# Altium PCB A.PcbDoc (part 2 of 3)
Units mm, origin at the board's own origin, x right, y up, seen from the top; angles counter-clockwise.
Board outline 93 x 60 mm, 2 copper layers (Top Layer, Bottom Layer); 76 components, 75 nets, 446 pads, 247 vias.
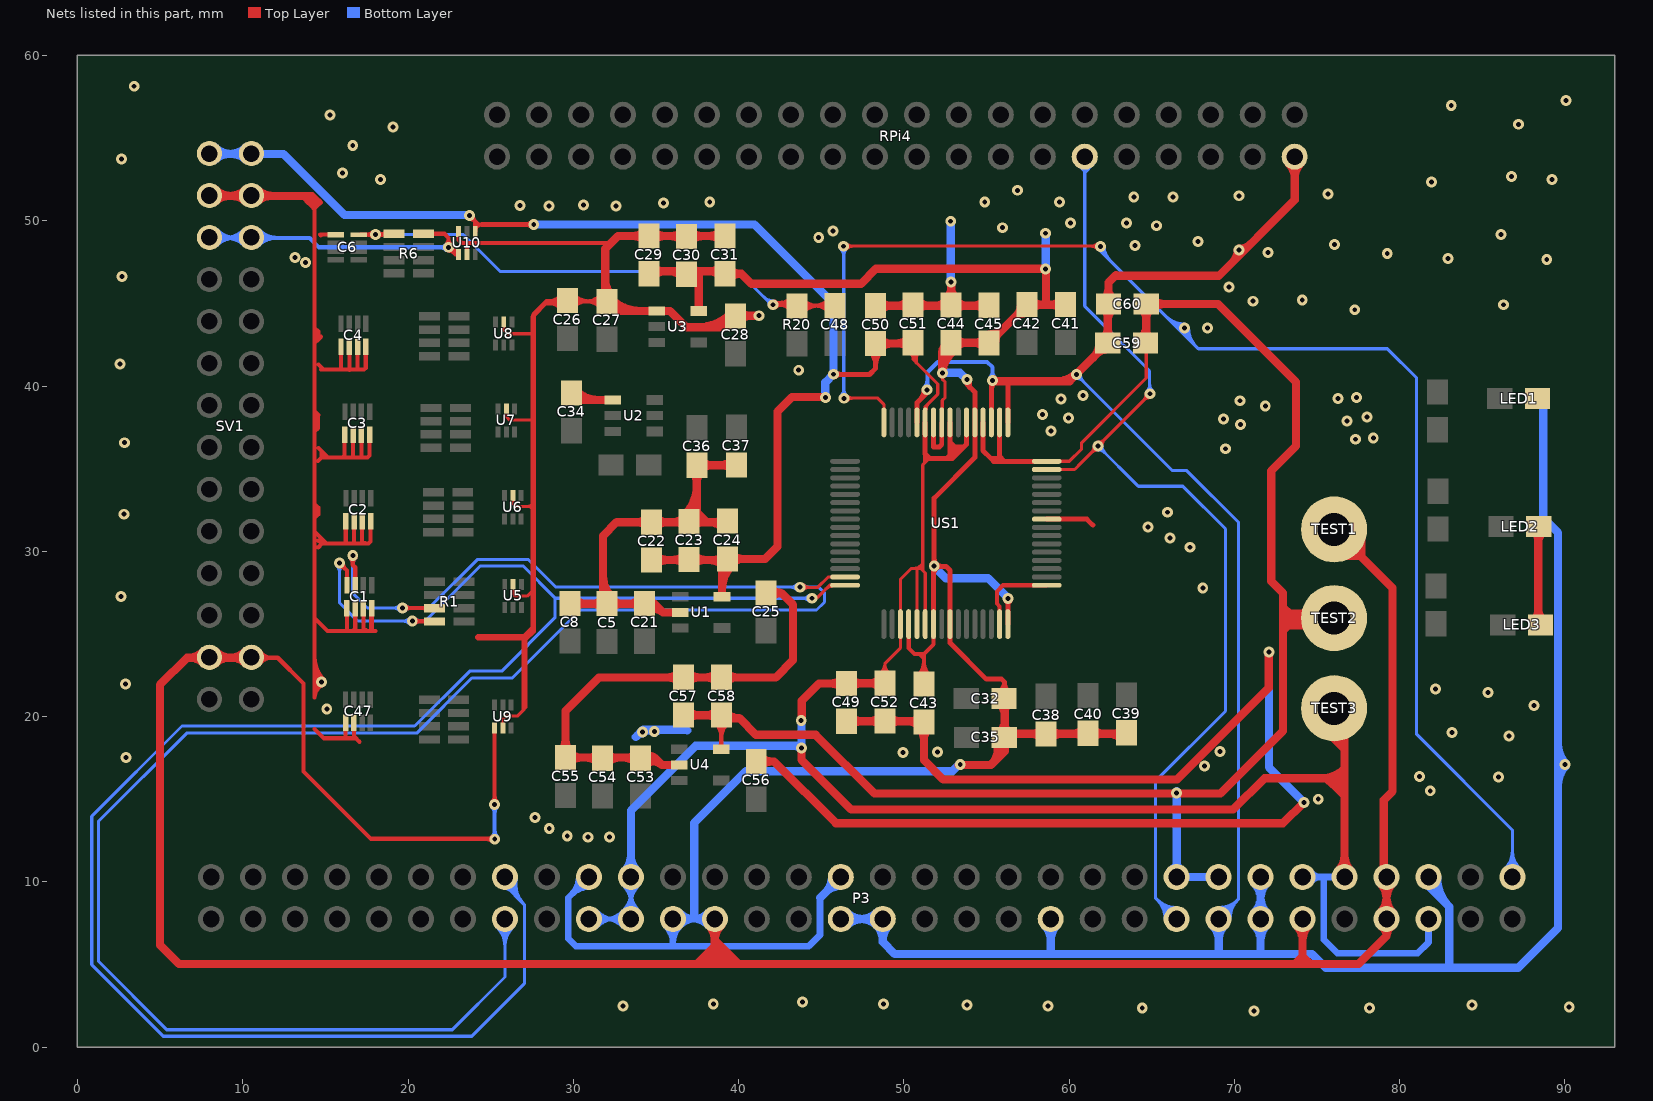
[diagram p2: the nets of this part, all layers, seen from the top]

## Via types
v1: diameter 0.66, hole 0.3, Top Layer to Bottom Layer, tented both sides, 247 vias

## Nets (pads, with @x,y where several pads share a name; then routed paths per layer and width w, separated by ;. In a path a pad name is that pad's centre, name@x,y a point inside that pad or via, vN(x,y) a via of type N, cw(c..) or ccw(c..) an arc to the next point about the centre after c; other vN are vias at no path point) (continued)
AVDD: C22.1 C23.1 C24.1 C49.1 C50.1 C51.1 C52.1 P3.19 P3.21 P3.22 P3.54 P3.56 P3.59 SV1.25 SV1.26 TEST3.1 U1.5 U10.4 US1.19 US1.21 US1.22 US1.54 US1.56 US1.59 | length 267.2
  Top Layer w0.19: C49.1@46.526,22.004 C49.1@46.538,22.016 ; C52.1@48.534,22.581 ccw(c48.087,23.199) 48.85,23.199 ; C52.1@48.645,22.427 ccw(c48.355,22.828) 48.85,22.828 ccw(c49.344,22.828) C52.1@49.055,22.427 ; C52.1@48.85,22.016 48.85,23.199 ; C52.1@49.166,22.581 cw(c49.613,23.199) 48.85,23.199 ; C51.1@50.32,42.007 cw(c50.116,41.607) 50.565,41.607 ; C51.1@50.36,41.989 cw(c50.12,41.403) 50.753,41.403 ; C51.1@50.432,42.165 cw(c50.236,41.686) 50.753,41.686 ; C51.1@50.516,42.566 C51.1@50.565,42.616 50.565,41.607 ; 50.753,41.639 cw(c51.415,41.639) C51.1@50.947,42.107 ; US1.21@50.793,25.596 50.793,28.919 ; US1.22@51.293,25.596 51.293,28.684 51.143,28.834 ; 51.293,35.886 51.241,35.834 51.241,35.329 ; US1.59@51.293,37.796 51.293,38.752 52.053,39.512 52.053,40.12 50.753,41.419 ; US1.59@51.348,38.546 cw(c51.979,38.546) 51.533,38.992 ; 51.386,35.793 51.399,35.78 51.399,35.487 ; 51.524,35.612 51.399,35.487 ; 48.85,23.199 49.793,24.142 US1.19@49.793,25.596 49.793,28.295 50.466,28.968 50.625,28.968 ; 50.565,41.607 cw(c51.014,41.607) 50.81,42.007 ccw(c50.948,41.87) 50.753,41.87 50.753,41.419 ; 50.565,41.607 50.753,41.419 ; 50.625,28.968 ccw(c50.625,29.535) 51.026,29.134 51.143,29.252 ; 50.625,28.968 51.009,28.968 51.143,28.834 ; 51.143,28.834 51.143,29.252 ; 51.143,29.252 51.143,35.231 51.241,35.329 ; 51.241,35.329 51.399,35.487
  Top Layer w0.25: v1(23.726,50.305) 24.067,49.963 ; v1@23.729,50.1 cw(c23.737,49.633) 24.067,49.963 ; v1@23.931,50.301 ccw(c24.398,50.293) 24.067,49.963 ; U10.4@24.067,49.356 24.067,49.963 ; U10.4@24.09,49.53 cw(c24.471,49.352) 24.471,49.773 24.257,49.773 24.067,49.963 ; C24.1@38.998,29.217 39.254,29.472 C24.1@39.32,29.538
  Top Layer w0.3: 24.471,49.773 v1(27.608,49.773) ; v1@27.48,49.646 ccw(c27.173,49.338) 27.173,49.773 ccw(c27.173,50.207) v1@27.48,49.9 ; v1@45.727,40.599 45.822,40.694 47.922,40.694 48.295,41.067 C50.1@48.295,42.566 ; v1@45.866,40.585 cw(c46.129,40.322) 46.129,40.694 ; v1@45.866,40.84 ccw(c46.218,41.192) 46.218,40.694 ; C50.1@47.952,42.096 cw(c47.124,41.268) 48.295,41.268 cw(c49.466,41.268) C50.1@48.638,42.096 ; US1.59@51.293,37.796 51.293,35.886 51.386,35.793 ; 51.399,35.78 51.565,35.614 52.6,35.614 ; US1.56@52.793,37.796 52.793,36.587 ; US1.54@53.793,37.796 53.793,36.47 53.635,36.312 ; 52.6,35.614 52.793,35.807 52.793,36.233 ; 52.6,35.614 52.938,35.614 53.056,35.733 ; 52.793,36.233 52.979,36.046 ; 52.793,36.233 52.793,36.587 ; 52.793,36.587 53.069,36.312 53.635,36.312 ; 52.979,36.046 53.369,36.046 ; 52.979,36.046 53.056,35.97 53.056,35.733 ; 53.056,35.733 53.369,36.046 ; 53.369,36.046 53.635,36.312
  Top Layer w0.5: C22.1@34.741,29.472 C24.1@39.254,29.472 ; C22.1@35.014,29.2 cw(c35.671,28.543) 35.671,29.472 cw(c35.671,30.402) C22.1@35.014,29.744 ; 35.986,29.472 ccw(c35.986,30.537) C23.1@36.739,29.784 ; 36.177,29.472 cw(c36.177,28.678) C23.1@36.739,29.24 ; C23.1@37.283,29.24 cw(c37.845,28.678) 37.845,29.472 ; C23.1@37.283,29.784 ccw(c38.036,30.537) 38.036,29.472 ; 38.243,29.472 cw(c38.243,28.334) C24.1@39.048,29.139 ; 38.538,29.472 ccw(c38.538,30.193) C24.1@39.048,29.683 ; U1.5@38.998,27.252 C24.1@38.998,29.217 ; 38.998,27.705 cw(c41.026,27.705) C24.1@39.592,29.139 ; C24.1@39.32,29.538 41.61,29.538 42.351,30.279 42.351,38.46 43.228,39.337 45.18,39.337 v1@45.252,39.265 ; C24.1@39.592,29.266 cw(c40.249,28.609) 40.249,29.538 cw(c40.249,30.468) C24.1@39.592,29.81 ; v1@43.814,18.148 v1(43.814,18.11) 43.814,17.382 46.816,14.381 69.928,14.381 71.814,16.267 75.252,16.267 ; v1@43.829,19.718 43.829,20.96 44.873,22.004 C49.1@46.526,22.004 ; C49.1@46.253,21.732 ccw(c45.596,21.074) 45.596,22.004 ccw(c45.596,22.933) C49.1@46.253,22.276 ; C49.1@46.538,22.016 C52.1@48.85,22.016 ; C49.1@46.798,21.732 cw(c47.484,21.045) 47.484,22.016 ; C49.1@46.798,22.276 ccw(c47.426,22.904) 47.426,22.016 ; C50.1@48.295,42.566 C51.1@50.516,42.566 ; C50.1@48.567,42.294 cw(c49.224,41.637) 49.224,42.566 cw(c49.224,43.496) C50.1@48.567,42.838 ; C52.1@48.578,21.744 ccw(c47.92,21.087) 47.92,22.016 ccw(c47.92,22.945) C52.1@48.578,22.288 ; 49.517,42.566 ccw(c49.517,43.664) C51.1@50.293,42.888 ; 49.755,42.566 cw(c49.755,41.805) C51.1@50.293,42.343 ; TEST3.1@74.665,20.026 76.665,18.025 ; TEST3.1@76.036,20.501 76.665,19.872 76.665,18.025 ; P3.56@76.285,10.672 ccw(c75.367,11.59) 76.665,11.59 ccw(c77.962,11.59) P3.56@77.045,10.672 ; 76.631,15.854 76.034,15.854 ; P3.56@76.665,10.292 76.665,15.223 ; 75.252,16.267 ccw(c75.252,18.265) 76.665,16.852 ; 75.252,16.267 75.579,16.267 75.991,15.854 ; 75.991,15.854 76.665,16.528 ; 75.991,15.854 76.034,15.854 ; 76.034,15.854 76.665,15.223 ; 76.665,15.223 76.665,16.528 ; 76.665,16.528 76.665,16.852 ; 76.665,16.852 76.665,18.025
  Bottom Layer w0.19: P3.19@30.945,7.752 P3.21@33.485,7.752 P3.22@33.485,10.292 ; P3.19@31.3,7.397 cw(c32.158,6.54) 32.158,7.752 cw(c32.158,8.965) P3.19@31.3,8.108 ; P3.19@31.434,7.263 cw(c32.616,6.081) 32.616,7.752 cw(c32.616,9.424) P3.19@31.434,8.242 ; P3.21@32.995,7.263 ccw(c31.813,6.081) 31.813,7.752 ccw(c31.813,9.424) 32.995,8.242 ccw(c31.813,9.424) 33.485,9.424 ccw(c35.156,9.424) P3.21@33.974,8.242 ; P3.22@32.995,9.803 cw(c31.813,8.621) 33.485,8.621 cw(c35.156,8.621) P3.22@33.974,9.803 ; P3.21@33.13,7.397 ccw(c32.272,6.54) 32.272,7.752 ccw(c32.272,8.965) 33.13,8.108 ccw(c32.272,8.965) 33.485,8.965 ccw(c34.698,8.965) P3.21@33.84,8.108 ; P3.22@33.13,9.937 cw(c32.272,9.08) 33.485,9.08 cw(c34.698,9.08) P3.22@33.84,9.937 ; v1@43.72,19.638 43.814,19.638 v1@43.829,19.638 ; 75.18,10.292 75.4,10.072
  Bottom Layer w0.4: P3.54@74.125,10.292 75.18,10.292 ; P3.54@74.624,9.983 cw(c75.18,9.639) 75.18,10.292 ; P3.54@74.624,10.602 ccw(c75.18,10.946) 75.18,10.292 ; 75.4,10.072 75.4,6.51 76.236,5.675 81.082,5.675 81.745,6.338 P3.59@81.745,7.752 ; P3.56@76.665,10.292 75.18,10.292
  Bottom Layer w0.5: SV1.26@7.903,54.038 12.471,54.038 16.158,50.351 v1@23.465,50.351 ; SV1.26@8.346,53.705 cw(c9.151,52.9) 9.151,54.038 ; SV1.26@8.346,54.429 ccw(c9.29,55.372) 9.29,54.038 ; 9.218,54.038 ccw(c9.218,55.372) SV1.25@10.162,54.429 ; 9.358,54.038 cw(c9.358,52.9) SV1.25@10.162,53.705 ; v1(27.608,49.773) 40.967,49.773 45.739,45.001 v1(45.739,40.712) 45.252,40.225 v1@45.252,39.265 ; P3.22@33.105,10.672 ccw(c32.187,11.59) 33.485,11.59 ccw(c34.782,11.59) P3.22@33.865,10.672 ; P3.22@33.485,10.292 33.485,14.318 37.4,18.234 v1@43.814,18.234 ; 43.322,18.234 cw(c43.322,17.618) v1@43.758,18.054 ; v1(43.791,19.751) v1@43.814,19.727 ; v1@43.814,18.148 v1@43.814,19.638
  other v1: 45.261,39.313
AVSS: C29.1 C30.1 C31.1 C32.2 C35.1 C38.2 C39.2 C40.2 C41.2 C42.2 C43.1 C44.1 C45.1 P3.20 P3.23 P3.25 P3.32 P3.53 P3.57 P3.58 SV1.1 SV1.2 TEST1.1 U3.5 U9.1 US1.20 US1.23 US1.25 US1.32 US1.53 US1.57 US1.58 | length 418.7
  Top Layer w0.19: C29.1@34.733,46.792 C29.1@34.886,46.945 ; C31.1@39.179,46.792 39.179,46.927 39.197,46.945 C31.1@39.22,46.945 ; v1@51.792,29.008 51.861,29.077 51.861,29.085 v1(51.837,29.109) ; v1@52.223,40.592 cw(c52.124,40.406) 52.334,40.406 ; US1.57@52.254,38.585 ccw(c52.091,38.748) 52.322,38.748 ; US1.57@52.293,37.796 52.322,37.825 52.322,39.132 52.496,39.306 52.496,40.245 52.334,40.406 ; 52.322,41.557 cw(c52.902,41.557) C44.1@52.881,42.137 ; 52.322,41.754 cw(c52.895,41.754) C44.1@52.873,42.327 ; C44.1@52.322,41.951 cw(c52.888,41.951) C44.1@52.866,42.517 ; C44.1@52.322,42.149 cw(c52.88,42.149) C44.1@52.859,42.707 ; v1(52.334,40.799) 52.334,40.406 ; v1@52.445,40.592 ccw(c52.545,40.406) 52.334,40.406 ; C44.1@52.723,42.469 C44.1@52.867,42.614 ; v1@53.907,40.413 v1@53.922,40.399 ; C45.1@55.133,42.614 C45.1@55.146,42.602 ; v1@56.206,27.246 v1@56.214,27.253 ; C42.2@57.445,44.902 C42.2@57.445,44.923 ; 58.6,44.951 58.628,44.923 ; 74.073,5.026 74.125,5.078 ; P3.58@79.041,10.456 P3.58@79.205,10.292 ; 52.322,41.5 cw(c53.692,41.5) 52.327,41.62 cw(c53.692,41.5) 52.723,42.469 52.327,42.073 52.322,42.068 52.322,41.5
  Top Layer w0.25: SV1.2@7.903,23.558 SV1.1@10.143,23.558 ; SV1.2@8.258,23.313 cw(c8.849,22.722) 8.849,23.558 ; SV1.2@8.258,23.86 ccw(c8.988,24.591) 8.988,23.558 ; SV1.2@8.435,23.136 cw(c9.452,22.118) 9.452,23.558 ; SV1.2@8.435,24.037 ccw(c9.592,25.194) 9.592,23.558 ; 8.917,23.558 ccw(c8.917,25.194) SV1.1@10.074,24.037 ; 9.056,23.558 cw(c9.056,22.118) SV1.1@10.074,23.136 ; 9.52,23.558 ccw(c9.52,24.591) SV1.1@10.251,23.86 ; 9.66,23.558 cw(c9.66,22.722) SV1.1@10.251,23.313 ; SV1.1@10.443,23.558 11.725,23.558 ; SV1.1@10.716,23.14 cw(c11.725,22.131) 11.725,23.558 ; SV1.1@11.014,23.852 ccw(c11.725,24.563) 11.725,23.558 ; SV1.1@11.038,23.21 cw(c11.725,22.706) 11.725,23.558 ; SV1.1@11.065,23.924 ccw(c11.725,24.336) 11.725,23.558 ; 24.693,12.605 cw(c24.693,12.024) v1@25.104,12.435 ; 24.815,12.605 ccw(c24.815,13.014) v1@25.104,12.725 ; v1@25.094,14.825 ccw(c24.744,15.175) 25.239,15.175 ccw(c25.734,15.175) v1@25.384,14.825 ; v1(25.239,14.68) U9.1@25.239,19.3 ; v1@25.313,12.605 17.755,12.605 13.684,16.676 13.684,21.991 12.118,23.558 11.725,23.558 ; US1.20@50.293,25.596 50.293,24.138 50.64,23.791 50.947,23.791 ; C43.1@50.852,22.451 ccw(c49.981,23.321) 51.212,23.321 ccw(c52.444,23.321) C43.1@51.573,22.451 ; C43.1@51.212,21.963 51.212,23.526 ; US1.23@51.793,25.596 51.793,24.372 51.212,23.791 ; 50.947,23.791 51.212,23.526 ; 50.947,23.791 51.212,23.791 ; 51.212,23.526 51.212,23.791
  Top Layer w0.3: v1@51.71,29.236 ccw(c51.403,29.543) 51.837,29.543 ccw(c52.272,29.543) 51.965,29.236 ccw(c52.348,29.619) 52.348,29.077 ; v1@51.792,29.008 51.793,29.007 US1.23@51.793,25.596 ; 51.793,28.567 cw(c52.379,28.567) 51.965,28.981 cw(c52.196,28.75) 52.196,29.077 ; US1.58@51.793,37.796 51.793,36.312 52.144,36.312 52.293,36.46 US1.57@52.293,37.796 ; v1(51.837,29.109) 51.837,33.217 54.293,35.672 US1.53@54.293,37.796 54.293,39.634 53.98,39.947 ; v1@51.861,29.077 52.564,29.077 52.793,28.848 US1.25@52.793,25.596 52.793,24.46 ; 53.003,24.25 52.793,24.46 ; v1@53.761,40.213 cw(c53.67,39.917) 53.98,39.917 ; v1(53.813,40.385) 53.813,40.114 53.98,39.947 ; v1@53.975,40.306 ccw(c54.307,40.143) 54.046,39.881 53.98,39.947 ; v1@53.98,40.358 53.98,39.947 ; C32.2@55.771,21.475 ccw(c55.308,22.098) 56.084,22.098 ; C32.2@56.084,21.151 56.084,22.098 ; v1@56.184,27.016 cw(c55.921,26.752) 56.293,26.752 ; US1.32@56.293,25.596 v1@56.293,27.064 ; 56.293,26.664 cw(c56.79,26.664) v1@56.438,27.016 ; C32.2@56.378,21.452 cw(c56.94,22.098) 56.084,22.098 ; 52.793,24.46 54.991,22.262 55.92,22.262 56.084,22.098 ; v1@53.957,40.277 ccw(c54.157,40.125) 53.98,39.947 ; v1@53.957,40.277 ccw(c54.157,40.125) 53.98,39.947 ; v1@53.957,40.277 ccw(c54.157,40.125) 53.98,39.947
  Top Layer w0.5: 6.678,23.558 ccw(c6.678,24.892) SV1.2@7.622,23.949 ; 6.818,23.558 cw(c6.818,22.42) SV1.2@7.622,23.225 ; SV1.2@8.346,23.225 cw(c9.151,22.42) 9.151,23.558 ; SV1.2@8.346,23.949 ccw(c9.29,24.892) 9.29,23.558 ; 9.218,23.558 ccw(c9.218,24.892) SV1.1@10.162,23.949 ; 9.358,23.558 cw(c9.358,22.42) SV1.1@10.162,23.225 ; SV1.1@10.443,23.558 7.903,23.558 6.629,23.558 4.997,21.926 4.997,6.169 6.14,5.026 37.473,5.026 ; C29.1@34.847,46.646 cw(c35.567,45.926) 35.567,46.945 ; C29.1@34.847,47.191 ccw(c35.441,47.785) 35.441,46.945 ; C29.1@34.886,46.945 C31.1@39.197,46.945 ; 35.79,46.945 cw(c35.79,45.825) C30.1@36.582,46.617 ; 36.059,46.945 ccw(c36.059,47.684) C30.1@36.582,47.161 ; C30.1@37.126,46.617 cw(c37.918,45.825) 37.918,46.945 ; C30.1@37.126,47.161 ccw(c37.649,47.684) 37.649,46.945 ; U3.5@37.588,44.539 37.588,46.867 ; P3.25@38.185,7.372 cw(c37.272,6.457) 38.565,6.457 ; 38.186,46.945 cw(c38.186,45.926) C31.1@38.907,46.646 ; 38.313,46.945 ccw(c38.313,47.785) C31.1@38.907,47.191 ; P3.25@38.565,7.752 38.565,6.457 ; P3.25@38.944,7.372 ccw(c39.858,6.457) 38.565,6.457 ; C31.1@39.179,46.792 40.179,46.792 40.788,46.182 47.401,46.182 48.32,47.101 v1@58.619,47.101 ; C31.1@39.451,46.519 cw(c40.108,45.862) 40.108,46.792 cw(c40.108,47.721) C31.1@39.451,47.064 ; v1@52.327,40.692 cw(c54.144,40.692) C44.1@53.091,42.173 ; v1@52.327,40.776 52.327,41.62 C44.1@52.327,42.073 ; 52.327,41.662 cw(c53.454,41.662) C44.1@52.801,42.581 ; C44.1@52.327,42.017 cw(c52.914,42.017) C44.1@52.856,42.601 ; C44.1@53.14,42.342 cw(c53.797,41.684) 53.797,42.614 cw(c53.797,43.543) 53.14,42.886 C44.1@52.867,42.614 C45.1@55.133,42.614 ; v1@53.306,17.076 55.279,17.076 ; 54.187,42.614 cw(c54.187,41.643) C45.1@54.873,42.33 ; 54.245,42.614 ccw(c54.245,43.502) C45.1@54.873,42.874 ; C45.1@55.146,42.602 C42.2@57.445,44.902 ; C45.1@55.146,43.114 ccw(c55.146,44.35) 56.02,43.476 ; C45.1@55.531,42.729 cw(c56.153,42.729) C45.1@55.713,43.169 ; C35.1@55.586,18.598 cw(c54.286,18.068) 55.279,17.076 ; C32.2@55.788,20.814 cw(c55.028,20.054) 56.103,20.054 ; C35.1@55.797,19.015 ccw(c55.06,19.753) 56.103,19.753 ; 55.811,17.609 ccw(c55.043,18.377) C35.1@56.049,18.786 ; C35.1@56.103,18.623 C32.2@56.103,20.947 ; 56.103,19.592 ccw(c56.919,19.592) C35.1@56.342,19.015 ; 56.103,20.259 cw(c56.887,20.259) C32.2@56.333,20.814 ; 56.608,44.064 cw(c57.445,43.227) C42.2@57.445,44.411 ; C42.2@56.863,44.319 ccw(c56.386,44.796) C42.2@57.06,44.796 ; C42.2@57.445,44.923 58.628,44.923 C41.2@59.783,44.923 ; 57.652,18.956 cw(c57.652,17.981) C38.2@58.341,18.67 ; 57.716,18.956 ccw(c57.716,19.84) C38.2@58.341,19.215 ; C42.2@57.718,44.651 cw(c58.375,43.994) 58.375,44.923 cw(c58.375,45.853) C42.2@57.718,45.195 ; 58.6,44.951 v1@58.6,47.075 ; C38.2@58.886,18.67 cw(c59.575,17.981) 59.575,18.956 ; C38.2@58.886,19.215 ccw(c59.511,19.84) 59.511,18.956 ; C41.2@59.511,44.651 ccw(c58.853,43.994) 58.853,44.923 ccw(c58.853,45.853) C41.2@59.511,45.195 ; 60.138,18.956 ccw(c60.138,20.002) C40.2@60.877,19.262 ; 60.303,18.956 cw(c60.303,18.143) C40.2@60.877,18.718 ; C40.2@61.422,18.718 cw(c61.997,18.143) 61.997,18.956 ; C40.2@61.422,19.262 ccw(c62.162,20.002) 62.162,18.956 ; 62.391,18.956 cw(c62.391,17.831) C39.2@63.187,18.626 ; 62.668,18.956 ccw(c62.668,19.69) C39.2@63.187,19.171 ; C39.2@63.341,18.956 56.109,18.956 56.109,17.906 55.279,17.076 ; P3.53@73.745,7.372 cw(c72.827,6.455) 74.125,6.455 cw(c75.422,6.455) P3.53@74.505,7.372 ; 74.125,5.078 74.125,5.485 ; P3.53@74.125,7.752 74.125,5.485 ; 74.899,5.026 74.583,5.026 ; TEST1.1@75.807,29.713 77.646,29.713 ; TEST1.1@76.036,31.322 77.646,29.713 ; TEST1.1@76.914,29.808 cw(c77.218,29.285) 77.646,29.713 ; TEST1.1@77.55,30.444 ccw(c78.073,30.14) 77.646,29.713 ; TEST1.1@77.694,31.554 77.694,29.664 ; P3.57@78.825,8.132 ccw(c77.907,9.05) 79.205,9.05 ccw(c80.502,9.05) P3.57@79.585,8.132 ; P3.58@78.825,9.912 cw(c77.907,8.995) 79.205,8.995 cw(c80.502,8.995) P3.58@79.585,9.912 ; P3.57@78.893,7.315 cw(c78.461,6.71) 79.205,6.71 ; P3.58@79.041,10.456 79.041,14.955 79.567,15.481 79.567,27.791 77.694,29.664 ; P3.58@79.205,10.292 P3.57@79.205,7.752 79.205,6.709 ; P3.57@79.517,7.315 ccw(c79.948,6.71) 79.205,6.71 ; 37.473,5.026 39.995,5.026 ; 37.473,5.026 37.871,5.424 ; 37.871,5.424 38.379,5.932 ; 37.871,5.424 38.752,5.424 ; 38.379,5.932 39.089,5.932 ; 38.379,5.932 38.565,6.118 38.565,6.457 ; 38.379,5.932 38.752,5.56 38.752,5.424 ; 38.565,6.457 39.089,5.932 ; 38.752,5.424 39.175,5.847 ; 38.752,5.424 39.476,5.424 39.537,5.484 ; 39.089,5.932 39.175,5.847 ; 39.175,5.847 39.537,5.484 ; 39.537,5.484 39.995,5.026 ; 39.995,5.026 73.667,5.026 ; 73.667,5.026 74.125,5.485 ; 73.667,5.026 74.073,5.026 74.583,5.026 ; 74.125,5.485 74.583,5.026 ; 74.583,5.026 77.522,5.026 79.205,6.709 ; 77.646,29.713 77.694,29.664 ; 52.327,41.465 cw(c52.968,41.465) 52.905,42.104 ccw(c52.968,41.465) 52.327,41.465
  Bottom Layer w0.19: 36.02,6.112 36.025,6.117
  Bottom Layer w0.25: v1@25.094,14.535 cw(c24.744,14.185) 25.239,14.185 cw(c25.734,14.185) v1@25.384,14.535 ; v1@25.104,12.725 ccw(c24.779,13.05) 25.239,13.05 ; 25.239,13.1 ccw(c25.769,13.1) v1@25.394,12.725 ; v1(25.239,14.68) 25.239,12.59 v1(25.249,12.58)
  Bottom Layer w0.4: P3.20@30.357,10.292 cw(c28.939,10.292) 29.942,9.29 cw(c30.945,8.287) P3.20@30.945,9.705 ; P3.20@30.945,10.292 29.695,9.043 29.695,6.565 30.148,6.112 36.02,6.112 44.252,6.112 44.927,6.787 44.927,9.034 ; P3.23@35.609,7.337 cw(c34.607,6.334) 36.025,6.334 cw(c37.443,6.334) 36.44,7.337 cw(c37.443,6.334) 37.443,7.752 cw(c37.443,9.171) P3.23@36.44,8.168 ; 36.025,6.117 P3.23@36.025,7.752 P3.25@38.565,7.752 ; P3.25@38.149,7.337 ccw(c37.147,6.334) 37.147,7.752 ccw(c37.147,9.171) P3.25@38.149,8.168
  Bottom Layer w0.5: 37.312,7.806 37.312,13.564 40.443,16.694 52.938,16.694 v1@53.375,17.131 ; 44.927,9.034 P3.32@46.185,10.292 ; P3.32@45.647,10.292 cw(c44.35,10.292) 45.267,9.375 cw(c46.185,8.458) P3.32@46.185,9.755 ; v1(51.837,29.109) 51.837,29.065 52.528,28.375 55.092,28.375 v1@56.214,27.253 ; v1(52.334,40.799) 53.399,40.799 v1(53.813,40.385) ; v1@58.578,47.142 v1@58.578,49.214
  other v1: 53.412,17.108 56.311,27.143 58.58,47.075 58.565,49.243
BIAS_DRV: C6.1 C48.1 R6.8 R20.2 | length 44.2
  Top Layer w0.19: R6.8@19.093,49.156 R6.8@19.148,49.211 ; R20.2@43.458,44.918 R20.2@43.533,44.843 R20.2@43.551,44.861
  Top Layer w0.25: C6.1@17.124,49.156 R6.8@19.093,49.156 ; C6.1@17.507,49.156 ccw(c17.507,49.679) v1@17.876,49.309 ; 17.546,49.156 cw(c17.546,48.689) v1@17.876,49.019 ; v1@18.166,49.019 cw(c18.497,48.689) 18.497,49.156 ; v1@18.166,49.309 ccw(c18.536,49.679) R6.8@18.536,49.156 ; v1@18.194,49.275 ccw(c18.373,49.39) 18.429,49.184 ; v1@18.323,49.156 ccw(c18.323,49.655) R6.8@18.676,49.302 ; v1(42.095,44.918) R20.2@43.458,44.918 ; v1@42.175,44.918 ccw(c42.175,46.327) R20.2@43.172,45.331 ; v1@42.198,45.095 ccw(c42.481,45.585) 42.627,45.039 ; v1@42.24,44.773 cw(c42.59,44.423) 42.59,44.918 cw(c42.59,45.413) v1@42.24,45.063 ; v1@42.273,44.815 cw(c42.64,44.603) 42.53,45.013 ; 42.428,44.918 cw(c42.428,43.865) R20.2@43.172,44.609 ; 42.779,44.918 ccw(c42.779,45.724) R20.2@43.349,45.154 ; R20.2@43.551,44.861 C48.1@45.833,44.861 ; R20.2@43.717,44.659 cw(c44.203,44.172) 44.203,44.861 ; R20.2@43.893,44.482 cw(c44.807,43.569) 44.807,44.861 ; R20.2@43.893,45.204 ccw(c44.721,46.031) 44.721,44.861 ; C48.1@45.472,44.5 ccw(c44.602,43.629) 44.602,44.861 ccw(c44.602,46.092) C48.1@45.472,45.221
  Bottom Layer w0.19: v1@18.054,49.167 23.342,49.167 25.58,46.929 39.982,46.929 v1@42.116,44.795 ; v1@18.188,48.998 cw(c18.595,48.59) 18.595,49.167 ; v1@18.188,49.33 ccw(c18.583,49.725) 18.583,49.167 ; 41.52,45.391 ccw(c42.095,45.965) v1@42.095,45.153 ; 41.766,45.145 cw(c41.538,44.918) v1@41.86,44.918
  other v1: 18.021,49.164
BIAS_HD: R6.1 SV1.21 SV1.22 U10.1 | length 36.9
  Top Layer w0.25: R6.1@20.926,49.211 22.201,49.211 22.452,48.96 v1(22.452,48.393) ; R6.1@21.398,49.12 cw(c21.618,48.899) 21.618,49.211 cw(c21.618,49.522) R6.1@21.398,49.302 ; v1@22.307,48.538 ccw(c21.957,48.888) 22.452,48.888 ccw(c22.947,48.888) v1@22.597,48.538 ; v1@22.452,48.188 cw(c22.452,47.693) 22.802,48.043 cw(c23.152,48.393) v1@22.657,48.393 ; v1@22.534,48.205 cw(c22.654,47.932) 22.803,48.19 cw(c22.952,48.449) v1@22.656,48.416 ; 22.837,48.008 ccw(c23.06,48.232) U10.1@23.084,47.916 ; U10.1@23.065,48.166 cw(c23.006,48.947) v1(22.452,48.393) ; U10.1@23.067,47.956 22.889,47.956 v1(22.452,48.393)
  Bottom Layer w0.25: SV1.22@7.903,48.958 11.312,48.958 ; SV1.22@8.258,48.713 cw(c8.849,48.122) 8.849,48.958 ; SV1.22@8.258,49.26 ccw(c8.988,49.991) 8.988,48.958 ; SV1.22@8.435,48.536 cw(c9.452,47.518) 9.452,48.958 ; SV1.22@8.435,49.437 ccw(c9.592,50.594) 9.592,48.958 ; 8.917,48.958 ccw(c8.917,50.594) SV1.21@10.074,49.437 ; 9.056,48.958 cw(c9.056,47.518) SV1.21@10.074,48.536 ; 9.52,48.958 ccw(c9.52,49.991) SV1.21@10.251,49.26 ; 9.66,48.958 cw(c9.66,48.122) SV1.21@10.251,48.713 ; SV1.21@10.798,48.713 cw(c11.389,48.122) 11.389,48.958 ; SV1.21@10.798,49.26 ccw(c11.528,49.991) 11.528,48.958 ; SV1.21@10.853,48.486 11.325,48.958 ; SV1.21@10.895,49.375 11.312,48.958 ; SV1.21@10.975,48.536 cw(c11.992,47.518) 11.992,48.958 ; SV1.21@10.975,49.437 ccw(c12.132,50.594) 12.132,48.958 ; v1@22.307,48.248 ccw(c21.957,47.898) 21.957,48.393 ccw(c21.957,48.888) v1@22.307,48.538 ; v1(22.452,48.393) 14.936,48.393 14.618,48.393 14.053,48.958 13.218,48.958 11.325,48.958 ; 11.312,48.958 cw(c11.312,49.12) 11.152,49.093 ccw(c11.312,49.12) 11.312,48.958 ; 11.312,48.958 ccw(c11.312,48.78) 11.14,48.825 cw(c11.312,48.78) 11.312,48.958 ; 11.312,48.958 11.325,48.958 ; 11.325,48.958 cw(c11.325,49.135) 11.151,49.103 ccw(c11.325,49.135) 11.325,48.958 ; 11.325,48.958 ccw(c11.325,48.763) 11.138,48.815 cw(c11.325,48.763) 11.325,48.958
DRDY: P3.47 RPi4.29 US1.47 | length 71.1
  Top Layer w0.19: US1.47@58.643,34.946 60.331,34.946 60.731,35.346 ; 60.553,35.168 60.731,35.346 ; 61.35,35.965 ccw(c60.938,36.376) v1@61.52,36.376 ; 61.364,35.979 cw(c61.755,35.588) v1@61.755,36.141 ; v1@61.755,36.611 ccw(c61.755,37.193) 62.166,36.782 ; v1@61.99,36.376 cw(c62.543,36.376) 62.152,36.767 ; 64.459,39.074 ccw(c64,39.533) v1@64.649,39.533 ; 64.54,39.155 cw(c64.884,38.811) v1@64.884,39.298 ; v1(64.884,39.533) 64.884,39.499 60.731,35.346
  Bottom Layer w0.19: RPi4.29@60.46,53.466 60.946,52.981 ; RPi4.29@60.772,53.206 cw(c60.713,52.981) 60.946,52.981 ; RPi4.29@60.946,53.876 60.946,52.981 ; RPi4.29@61.12,53.206 ccw(c61.178,52.981) 60.946,52.981 ; RPi4.29@61.472,53.432 60.946,52.905 ; v1@61.751,36.372 64.191,33.931 66.884,33.931 69.46,31.355 69.46,20.328 65.216,16.084 65.216,9.041 P3.47@66.505,7.752 ; v1@61.755,36.141 cw(c61.755,35.595) 62.142,35.981 ; v1@61.99,36.376 ccw(c62.578,36.376) 62.162,35.96 ; v1@64.718,39.699 ccw(c64.358,40.059) 64.867,40.059 ; v1@64.867,39.548 64.867,40.914 60.946,44.835 60.946,52.905 ; 64.867,40.141 ccw(c65.492,40.141) v1@65.05,39.699 ; P3.47@65.812,7.752 ccw(c64.141,7.752) 65.323,8.934 ccw(c66.505,10.116) P3.47@66.505,8.445 ; P3.47@66.002,7.752 ccw(c64.79,7.752) 65.647,8.61 ccw(c66.505,9.468) P3.47@66.505,8.255 ; 60.946,52.905 60.946,52.981
  other v1: 61.755,36.376
DVDD: C57.1 C58.1 C59.2 C60.1 P3.48 P3.50 TEST2.1 U4.5 US1.48 US1.50 US1.52 | length 135.8
  Top Layer w0.19: US1.48@58.643,35.446 60.007,35.446 60.753,36.192 60.753,36.571 64.664,40.482 64.664,42.634 C59.2@64.664,42.749
  Top Layer w0.25: C58.1@38.615,19.606 cw(c37.808,18.8) 38.949,18.8 ; C58.1@38.753,20.073 38.764,20.084 38.949,19.9 U4.5@38.949,18.021 ; U4.5@38.825,18.145 ccw(c38.526,18.443) 38.949,18.443 ccw(c39.371,18.443) U4.5@39.072,18.145 ; 38.949,18.671 cw(c40.271,18.671) C58.1@39.336,19.606 ; 38.949,19.275 cw(c39.667,19.275) C58.1@39.159,19.783 ; 43.948,18.897 43.954,18.903 ; C59.2@64.62,42.591 C59.2@64.664,42.634 ; 73.337,25.954 73.424,25.954 73.596,25.954
  Top Layer w0.3: US1.52@54.793,37.796 54.793,36.088 55.261,35.62 ; 55.793,35.491 55.793,35.733 ; US1.50@55.793,37.796 55.793,35.733 ; US1.48@58.643,35.446 56.079,35.446 ; 55.261,35.62 55.68,35.62 55.793,35.733 ; 55.261,35.62 55.435,35.446 56.079,35.446 ; 55.793,35.733 56.079,35.446
  Top Layer w0.5: C57.1@36.482,20.073 C58.1@38.753,20.073 ; C57.1@36.933,19.821 cw(c37.541,19.213) 37.541,20.073 ; C57.1@36.933,20.366 ccw(c37.639,21.072) 37.639,20.073 ; 37.997,20.073 ccw(c37.997,21.072) C58.1@38.703,20.366 ; 38.095,20.073 cw(c38.095,19.213) C58.1@38.703,19.821 ; C58.1@38.949,19.9 40.046,19.9 ; C58.1@39.247,19.694 cw(c39.744,19.198) 39.744,19.9 ; C58.1@39.251,20.235 ccw(c40.046,21.01) 40.046,19.9 ; C59.2@64.348,42.863 ccw(c63.586,43.625) 64.664,43.625 ; C60.1@64.391,44.686 cw(c63.734,44.029) 64.664,44.029 cw(c65.593,44.029) C60.1@64.936,44.686 ; C59.2@64.664,42.749 C60.1@64.664,44.958 69.016,44.958 73.725,40.249 73.725,36.368 72.221,34.864 72.221,28.195 72.939,27.477 72.939,26.611 ; 64.664,43.415 ccw(c65.445,43.415) C59.2@64.892,42.863 ; C60.1@65.063,44.686 cw(c65.72,44.029) 65.72,44.958 cw(c65.72,45.888) C60.1@65.063,45.23 ; 72.939,26.865 72.939,26.611 ; 73.192,25.954 73.337,25.954 ; TEST2.1@74.357,25.465 ccw(c73.701,25.273) 73.701,25.957 ; TEST2.1@74.357,26.448 cw(c73.698,26.64) 73.698,25.954 ; TEST2.1@74.357,26.448 cw(c73.701,26.64) 73.701,25.957 ; TEST2.1@74.358,25.461 ccw(c73.698,25.265) 73.698,25.954 ; TEST2.1@74.379,25.394 74.264,25.509 73.254,25.509 ; TEST2.1@75.931,25.954 73.698,25.954 ; 40.046,19.9 41.049,18.897 43.948,18.897 44.669,18.897 48.221,15.344 69.163,15.344 72.939,19.12 72.939,25.195 ; 72.939,25.195 72.939,25.469 ; 72.939,25.195 73.254,25.509 ; 72.939,25.469 73.424,25.954 73.427,25.957 73.593,25.957 ; 72.939,25.469 72.939,25.848 ; 72.939,25.848 73.321,26.229 ; 72.939,25.848 72.939,26.611 ; 72.939,26.611 73.321,26.229 ; 73.254,25.509 73.698,25.954 ; 73.321,26.229 75.764,26.229 TEST2.1@76.036,25.957 73.701,25.957 ; 73.321,26.229 73.593,25.957 ; 73.593,25.957 73.596,25.954 73.698,25.954 ; 73.593,25.957 73.701,25.957 ; 73.698,25.954 73.701,25.957
  Bottom Layer w0.19: P3.48@65.942,10.655 66.236,10.948 ccw(c65.585,11.598) 66.505,11.598 ; 66.505,11.851 ccw(c68.392,11.851) 67.058,10.517 P3.48@67.282,10.292
  Bottom Layer w0.5: v1@66.505,15.478 66.505,11.851 P3.48@66.505,10.292 67.282,10.292 P3.50@69.045,10.292
  other v1: 66.485,15.372
GND: C1.5 C1.6 C1.7 C1.8 C2.5 C2.6 C2.7 C2.8 C3.5 C3.6 C3.7 C3.8 C4.5 C4.6 C4.7 C4.8 C5.2 C6.8 C8.2 C21.2 C22.2 C23.2 C24.2 C25.2 C26.2 C27.2 C28.2 C29.2 C30.2 C31.2 C34.2 C36.2 C37.2 C43.2 C44.2 C45.2 C47.7 C47.8 C49.2 C50.2 C51.2 C52.2 C53.2 C54.2 C55.2 C56.2 C57.2 C58.2 C59.1 C60.2 LED1.2 LED2.2 LED3.2 P3.31 P3.33 P3.41 P3.49 P3.51 P3.52 P3.60 P3.64 RPi4.39 SV1.23 SV1.24 U1.2 U2.1 U3.1 U4.2 U5.2 U6.2 U7.2 U8.2 U9.2 U10.2 U10.6 US1.31 US1.33 US1.41 US1.49 US1.51 US1.60 US1.64 | length 776.3
  Top Layer w0.19: U9.2@25.739,19.3 25.739,19.818 25.8,19.879 25.8,19.889 25.936,20.024 26.609,20.024 26.947,20.362 ; U8.2@25.792,43.871 25.792,43.395 26.023,43.164 27.504,43.164 ; U7.2@25.955,38.616 25.955,38.129 26.15,37.934 27.504,37.934 ; U6.2@26.347,33.365 26.347,32.913 26.541,32.72 27.209,32.72 ; U5.2@26.353,27.998 26.353,27.429 26.492,27.29 27.206,27.29 27.504,27.588 ; 27.641,43.164 27.504,43.164 ; 28.491,44.974 cw(c28.491,43.886) C26.2@29.26,44.655 ; 28.647,45.164 28.539,45.164 ; 28.756,44.974 ccw(c28.756,45.781) C26.2@29.374,45.262 ; 28.949,44.974 cw(c28.949,44.345) C26.2@29.394,44.79 ; C26.2@29.215,44.833 ccw(c28.539,44.307) 28.539,45.164 ccw(c28.539,46.021) C26.2@29.215,45.496 ; C26.2@29.228,45.384 cw(c28.348,46.123) 28.348,44.974 ; C26.2@29.365,44.95 ccw(c28.927,44.609) 28.927,45.164 ccw(c28.927,45.72) C26.2@29.365,45.379 ; C26.2@29.391,44.92 29.337,44.974 28.348,44.974 ; C26.2@29.642,45.164 28.539,45.164 ; v1(46.367,39.257) 46.376,39.267 48.418,39.267 48.793,38.892 US1.64@48.793,37.796 ; v1@46.395,48.462 61.862,48.462 cw(c61.862,48.423) v1(61.89,48.45) ; v1@46.521,48.29 cw(c46.936,47.875) 46.936,48.462 ; v1@46.521,48.622 ccw(c46.908,49.009) 46.908,48.462 ; v1@46.533,39.091 cw(c46.957,38.668) 46.957,39.267 ; v1@46.533,39.424 ccw(c46.912,39.802) 46.912,39.267 ; 61.295,48.462 cw(c61.295,47.855) v1@61.723,48.284 ; 61.35,48.462 ccw(c61.35,48.99) v1@61.723,48.616 ; C60.2@62.334,44.915 C60.2@62.378,44.958 ; 26.947,20.362 26.947,24.611 27.504,25.168 27.504,25.258 27.504,27.588 ; 26.947,20.362 27.134,20.549 27.134,24.631 27.66,25.157 27.66,27.967 ; 27.209,32.72 ccw(c27.209,33.359) 27.504,32.792 ; 27.209,32.72 27.352,32.72 27.504,32.569 ; 27.504,27.588 ccw(c27.126,27.967) 27.66,27.967 ; 27.504,27.588 27.504,32.569 ; 27.504,32.569 27.504,32.792 ; 27.504,32.792 ccw(c27.209,33.359) 27.66,32.907 ; 27.504,32.792 27.504,37.934 ; 27.504,37.934 27.66,37.934 ; 27.504,37.934 27.504,43.164 ; 27.504,43.164 27.504,44.085 cw(c28.038,44.085) 27.66,44.463 ; 27.66,27.967 27.66,32.907 ; 27.66,32.907 27.66,37.934 ; 27.66,37.934 27.66,44.286 ; 27.66,44.286 27.66,44.463 ; 27.66,44.286 28.348,44.974 ; 27.66,44.463 28.361,45.164 28.539,45.164 ; 28.348,44.974 28.539,45.164
  Top Layer w0.25: 13.666,51.498 13.666,51.372 13.951,51.086 ; 13.853,51.626 14.211,51.626 14.303,51.534 ; 14.353,19.257 14.926,18.685 16.236,18.685 ; 14.353,21.157 cw(c15.182,21.157) v1@14.844,21.914 ; 14.353,21.25 14.353,32.021 ; 14.353,21.542 cw(c15.01,21.542) v1@14.742,22.142 ; 14.353,21.928 cw(c14.838,21.928) v1@14.641,22.371 ; 14.353,22.373 ccw(c15.032,22.373) v1@14.552,21.893 ; 14.353,22.976 ccw(c15.636,22.976) v1@14.729,22.069 ; 14.353,23.58 ccw(c16.24,23.58) v1@14.906,22.246 ; 14.353,25.967 15.135,25.185 16.66,25.185 ; 14.353,31.186 15.066,30.473 ; 14.562,35.453 14.774,35.665 14.876,35.665 ; 14.567,30.242 14.799,30.473 ; 14.567,30.662 14.756,30.473 14.799,30.473 ; 14.577,36.259 14.763,36.074 ; 14.582,41.3 14.894,40.988 ; 14.688,49.156 14.758,49.156 ; 14.688,51.149 14.468,51.369 ; 14.722,49.119 14.758,49.156 ; 14.736,40.988 14.894,40.988 ; 14.736,42.981 14.582,42.827 ; C6.8@15.724,49.156 14.758,49.156 ; 15.944,41.102 C4.8@15.944,42.136 ; 16.168,35.758 16.168,35.797 ; 16.168,36.099 16.168,35.797 ; C3.8@16.168,36.977 16.168,35.797 ; C47.8@16.229,19.623 16.229,18.691 16.236,18.685 ; 16.229,30.628 C2.8@16.229,31.662 ; 16.295,40.994 16.301,40.988 ; 16.298,25.257 C1.8@16.298,26.403 ; 16.459,40.986 C4.7@16.459,42.165 ; 16.524,35.671 16.53,35.665 ; 16.592,30.479 16.598,30.473 ; 16.654,25.191 16.66,25.185 ; 16.676,35.739 C3.7@16.676,36.918 ; C47.7@16.729,19.623 16.729,18.846 ; 16.734,30.483 C2.7@16.734,31.661 ; 16.811,25.202 C1.7@16.811,26.381 ; 16.937,41.109 C4.6@16.937,42.257 ; 17.062,18.474 16.756,18.78 cw(c16.822,18.846) 16.729,18.846 ; 17.18,35.708 C3.6@17.18,36.856 ; 17.224,30.505 C2.6@17.224,31.653 ; 17.304,25.242 C1.6@17.304,26.558 ; 17.392,30.51 17.356,30.473 ; C4.5@17.445,42.362 17.445,41.096 17.337,40.988 16.301,40.988 ; 17.454,25.221 17.418,25.185 ; C3.5@17.674,37.038 17.674,35.791 17.548,35.665 16.53,35.665 ; C2.5@17.733,31.784 17.733,30.595 17.611,30.473 17.356,30.473 ; 18.032,25.185 17.418,25.185 ; U10.6@23.067,49.356 23.067,48.842 23.266,48.643 23.493,48.643 ; U10.2@23.567,47.956 23.567,48.569 23.493,48.643 ; C26.2@29.642,45.164 29.687,45.12 C27.2@31.834,45.12 ; C26.2@29.826,45.348 ccw(c30.378,45.9) 30.378,45.12 ; C34.2@29.883,39.575 C34.2@30.298,39.159 ; C26.2@30.003,44.804 cw(c30.765,44.041) 30.765,45.12 ; C26.2@30.003,45.525 ccw(c30.981,46.503) 30.981,45.12 ; C27.2@31.665,44.759 ccw(c30.795,43.888) 30.795,45.12 ccw(c30.795,46.351) C27.2@31.665,45.48 ; C27.2@31.863,45.12 C27.2@31.834,45.12 ; C27.2@31.935,45.22 C27.2@31.834,45.12 ; 32.339,48.711 32.271,48.643 23.493,48.643 ; C23.2@37.011,31.798 C23.2@37.473,32.26 ; C58.2@38.753,22.359 C58.2@38.764,22.37 ; C24.2@39.254,31.758 C24.2@39.32,31.824 ; C37.2@39.842,35.21 C37.2@39.861,35.229 ; C56.2@40.655,17.071 C56.2@41.072,17.488 ; C43.2@51.171,19.718 C43.2@51.212,19.677 ; C45.2@55.11,44.852 C45.2@55.146,44.888 ; US1.31@55.793,25.596 55.793,26.665 55.626,26.832 55.626,27.564 56.008,27.946 US1.33@58.643,27.946 ; 13.951,51.086 13.951,51.182 14.303,51.534 ; 13.951,51.086 14.03,51.008 ; 14.03,51.008 14.392,51.369 14.468,51.369 ; 14.03,51.008 14.12,50.918 ; 14.12,50.918 14.315,51.112 ; 14.12,50.918 14.353,50.685 ; 14.303,51.534 14.468,51.369 ; 14.315,51.112 14.721,51.112 14.501,50.891 ; 14.315,51.112 14.315,51.077 14.501,50.891 ; 14.353,32.021 14.567,32.235 14.567,32.655 14.353,32.869 ; 14.353,32.021 14.353,32.869 ; 14.353,32.869 14.353,37.238 ; 14.353,37.238 14.353,38.476 ; 14.353,37.238 14.561,37.446 14.561,38.237 14.577,38.252 14.353,38.476 ; 14.353,38.476 14.353,42.598 ; 14.353,42.598 14.353,43.522 ; 14.353,42.598 14.582,42.827 ; 14.353,43.522 14.582,43.293 14.582,42.827 ; 14.353,43.522 14.353,50.685 ; 14.353,50.685 14.353,50.744 14.501,50.891 ; 14.763,36.074 14.763,35.778 14.876,35.665 ; 14.763,36.074 15.171,35.665 ; 14.799,30.473 15.066,30.473 ; 14.876,35.665 15.171,35.665 ; 14.894,40.988 16.301,40.988 ; 15.066,30.473 16.598,30.473 ; 15.171,35.665 16.036,35.665 ; 16.036,35.665 16.168,35.797 ; 16.036,35.665 16.53,35.665 ; 16.236,18.685 16.729,18.685 16.729,18.846 ; 16.598,30.473 17.356,30.473 ; 16.66,25.185 17.418,25.185
  Top Layer w0.3: 17.804,25.312 C1.5@17.804,26.558 ; US1.60@50.793,37.796 50.793,38.99 51.398,39.595 v1(51.398,39.772) ; 50.966,39.163 ccw(c50.356,39.772) v1@51.218,39.772 ; US1.51@55.293,37.796 55.293,40.06 v1@55.522,40.288 ; 55.293,39.74 cw(c55.969,39.74) v1@55.491,40.218 ; US1.49@56.293,37.796 56.293,40.195 ; US1.41@58.643,31.946 61.069,31.946 61.437,31.578
  Top Layer w0.4: 24.25,24.802 27.048,24.802 27.504,25.258
  Top Layer w0.5: SV1.24@7.903,51.498 13.666,51.498 13.89,51.498 13.91,51.477 ; SV1.24@8.346,51.165 cw(c9.151,50.36) 9.151,51.498 ; SV1.24@8.346,51.889 ccw(c9.29,52.832) 9.29,51.498 ; 9.218,51.498 ccw(c9.218,52.832) SV1.23@10.162,51.889 ; 9.358,51.498 cw(c9.358,50.36) SV1.23@10.162,51.165 ; SV1.23@10.886,51.165 cw(c11.691,50.36) 11.691,51.498 ; SV1.23@10.886,51.889 ccw(c11.83,52.832) 11.83,51.498 ; C55.2@29.258,17.917 ccw(c28.6,18.574) 29.53,18.574 ccw(c30.459,18.574) C55.2@29.802,17.917 ; C8.2@29.57,26.832 34.891,26.832 35.422,26.302 ; C55.2@29.802,17.246 cw(c30.459,16.588) 30.459,17.518 cw(c30.459,18.447) C55.2@29.802,17.79 ; C8.2@30.065,26.577 cw(c30.68,25.962) 30.68,26.832 ; C8.2@30.065,27.122 ccw(c30.764,27.821) 30.764,26.832 ; C34.2@30.155,39.72 ccw(c31.508,41.073) 31.508,39.159 ; C34.2@30.298,39.159 U2.1@32.402,39.159 ; 30.759,17.518 cw(c30.759,16.46) C54.2@31.507,17.208 ; 30.94,17.518 ccw(c30.94,18.319) C54.2@31.507,17.753 ; 31.117,26.832 ccw(c31.117,27.764) C5.2@31.776,27.105 ; 31.121,26.832 cw(c31.121,25.905) C5.2@31.776,26.561 ; C27.2@31.754,45.519 ccw(c31.317,45.956) 31.935,45.956 ; C5.2@31.798,26.844 31.798,30.934 32.623,31.758 C22.2@34.741,31.758 38.065,31.758 ; 31.798,28.494 ccw(c33.582,28.494) C5.2@32.321,27.232 ; C27.2@31.935,45.22 31.935,48.307 32.271,48.643 32.706,49.078 C29.2@34.574,49.078 C31.2@39.179,49.078 ; 31.935,46.396 ccw(c33.176,46.396) C27.2@32.298,45.519 ; C27.2@31.945,44.911 ccw(c32.843,45.81) 32.843,44.539 ; C27.2@32.026,45.12 32.607,44.539 U3.1@35.048,44.539 35.847,44.539 36.83,43.556 39.122,43.556 ; C54.2@32.051,17.208 cw(c32.799,16.46) 32.799,17.518 ; C54.2@32.051,17.753 ccw(c32.618,18.319) 32.618,17.518 ; C27.2@32.298,45.265 ccw(c34.05,47.017) 34.05,44.539 ; C5.2@32.321,26.561 cw(c32.976,25.905) 32.976,26.832 ; C5.2@32.321,27.105 ccw(c32.98,27.764) 32.98,26.832 ; 33.034,17.518 cw(c33.034,16.435) C53.2@33.799,17.201 ; 33.25,17.518 ccw(c33.25,18.294) C53.2@33.799,17.745 ; 33.37,26.832 ccw(c33.37,27.793) C21.2@34.049,27.114 ; 33.414,26.832 cw(c33.414,25.934) C21.2@34.049,26.569 ; C53.2@33.99,17.428 cw(c34.495,16.919) 35.002,17.426 ; C21.2@34.258,26.81 cw(c34.577,26.325) 34.987,26.736 ; C29.2@34.302,48.805 ccw(c33.645,48.148) 33.645,49.078 ccw(c33.645,50.007) C29.2@34.302,49.35 ; C53.2@34.343,17.073 cw(c34.849,16.563) 35.357,17.071 ; C53.2@34.344,17.745 ccw(c34.893,18.294) 34.893,17.518 ; C53.2@34.384,17.248 cw(c34.91,16.869) 34.91,17.518 ; C22.2@34.469,31.486 ccw(c33.812,30.829) 33.812,31.758 ccw(c33.812,32.688) C22.2@34.469,32.03 ; C21.2@34.533,26.393 cw(c34.921,25.801) 35.422,26.302 ; C29.2@34.847,48.805 cw(c35.504,48.148) 35.504,49.078 cw(c35.504,50.007) C29.2@34.847,49.35 ; C22.2@35.014,31.486 cw(c35.671,30.829) 35.671,31.758 cw(c35.671,32.688) C22.2@35.014,32.03 ; 35.682,22.359 ccw(c35.682,23.358) C57.2@36.388,22.652 ; 35.78,22.359 cw(c35.78,21.499) C57.2@36.388,22.107 ; 35.853,49.078 cw(c35.853,48.047) C30.2@36.582,48.776 ; 35.986,31.758 ccw(c35.986,32.823) C23.2@36.739,32.07 ; 35.996,49.078 ccw(c35.996,49.906) C30.2@36.582,49.32 ; 36.177,31.758 cw(c36.177,30.964) C23.2@36.739,31.526 ; U4.2@36.409,17.071 35.357,17.071 34.91,17.518 ; U1.2@36.458,26.302 35.422,26.302 ; C57.2@36.482,22.359 31.543,22.359 29.53,20.347 C55.2@29.53,17.518 34.91,17.518 ; C23.2@36.739,32.197 ccw(c34.965,33.971) 37.473,33.971 ; C57.2@36.809,22.359 C58.2@38.753,22.359 ; C57.2@36.933,22.107 cw(c37.541,21.499) 37.541,22.359 ; C57.2@36.933,22.652 ccw(c37.639,23.358) 37.639,22.359 ; C23.2@37.092,31.843 ccw(c36.172,32.764) 37.473,32.764 ; C30.2@37.126,48.776 cw(c37.855,48.047) 37.855,49.078 ; C30.2@37.126,49.32 ccw(c37.712,49.906) 37.712,49.078 ; C36.2@37.201,34.81 cw(c36.544,34.153) 37.473,34.153 cw(c38.403,34.153) C36.2@37.746,34.81 ; C23.2@37.283,31.526 cw(c37.845,30.964) 37.845,31.758 ; C23.2@37.283,32.07 ccw(c38.036,32.823) 38.036,31.758 ; C23.2@37.473,32.26 C23.2@37.473,32.35 ; 37.537,43.556 ccw(c37.537,46.374) C28.2@39.53,44.381 ; C36.2@37.746,34.937 cw(c38.403,34.28) 38.403,35.21 cw(c38.403,36.139) C36.2@37.746,35.482 ; 37.997,22.359 ccw(c37.997,23.358) C58.2@38.703,22.652 ; 38.095,22.359 cw(c38.095,21.499) C58.2@38.703,22.107 ; 38.243,31.758 cw(c38.243,30.62) C24.2@39.048,31.425 ; 38.538,31.758 ccw(c38.538,32.479) C24.2@39.048,31.969 ; 38.744,43.556 ccw(c38.744,45.167) C28.2@39.884,44.028 ; C58.2@38.764,22.37 42.254,22.37 43.292,23.408 43.292,26.772 42.588,27.476 ; 38.884,35.21 ccw(c38.884,36.206) C37.2@39.589,35.501 ; C31.2@38.907,48.805 ccw(c38.249,48.148) 38.249,49.078 ccw(c38.249,50.007) C31.2@38.907,49.35 ; 38.979,35.21 cw(c38.979,34.347) C37.2@39.589,34.957 ; C28.2@39.235,43.669 ccw(c38.795,44.109) C28.2@39.417,44.109 ; C58.2@39.247,22.107 cw(c39.882,21.472) 39.882,22.37 ; C58.2@39.247,22.652 ccw(c39.927,23.331) 39.927,22.37 ; C24.2@39.254,31.758 38.065,31.758 ; C28.2@39.722,43.733 ccw(c39.584,43.094) 39.122,43.556 ; C37.2@39.842,35.21 C36.2@37.473,35.21 C23.2@37.473,32.35 ; C28.2@40.075,43.964 cw(c40.772,43.266) 40.772,44.253 ; C28.2@40.075,44.508 ccw(c40.692,45.125) 40.692,44.253 ; C56.2@41.07,17.282 42.149,17.282 45.884,13.547 72.945,13.547 v1(74.209,14.812) ; v1(41.23,44.253) 39.819,44.253 C28.2@39.802,44.236 39.122,43.556 ; C56.2@41.342,17.01 cw(c42,16.353) 42,17.282 cw(c42,18.212) C56.2@41.342,17.554 ; C25.2@41.671,27.476 42.588,27.476 ; C25.2@41.946,27.206 cw(c42.588,26.576) 42.588,27.476 ; C25.2@41.946,27.745 ccw(c42.588,28.375) 42.588,27.476 ; C49.2@46.526,19.718 C43.2@51.171,19.718 ; C49.2@46.798,19.446 cw(c47.455,18.788) 47.455,19.718 cw(c47.455,20.647) C49.2@46.798,19.99 ; 47.891,19.718 ccw(c47.891,20.689) C52.2@48.578,20.002 ; 47.95,19.718 cw(c47.95,18.83) C52.2@48.578,19.458 ; C50.2@48.295,44.852 C45.2@55.11,44.852 ; C50.2@48.567,44.58 cw(c49.224,43.923) 49.224,44.852 cw(c49.224,45.782) C50.2@48.567,45.124 ; C52.2@49.122,19.458 cw(c49.75,18.83) 49.75,19.718 ; C52.2@49.122,20.002 ccw(c49.809,20.689) 49.809,19.718 ; 49.517,44.852 ccw(c49.517,45.95) C51.2@50.293,45.174 ; 49.755,44.852 cw(c49.755,44.091) C51.2@50.293,44.629 ; 50.184,19.718 cw(c50.184,18.649) C43.2@50.94,19.405 ; 50.381,19.718 ccw(c50.381,20.508) C43.2@50.94,19.949 ; C51.2@50.838,44.629 cw(c51.376,44.091) 51.376,44.852 ; C51.2@50.838,45.174 ccw(c51.614,45.95) 51.614,44.852 ; C43.2@50.94,19.278 cw(c50.283,18.621) 51.212,18.621 cw(c52.142,18.621) C43.2@51.485,19.278 ; C43.2@51.212,19.677 51.212,17.364 52.38,16.196 66.54,16.196 72.075,21.731 72.075,23.865 v1@72.035,23.905 ; 51.823,44.852 ccw(c51.823,45.945) C44.2@52.595,45.172 ; 52.053,44.852 cw(c52.053,44.086) C44.2@52.595,44.628 ; C44.2@52.595,45.299 ccw(c51.938,45.956) 52.867,45.956 ccw(c53.797,45.956) C44.2@53.14,45.299 ; C44.2@52.867,44.9 v1@52.867,46.294 ; C44.2@53.14,44.628 cw(c53.682,44.086) 53.682,44.852 ; C44.2@53.14,45.172 ccw(c53.912,45.945) 53.912,44.852 ; 54.13,44.852 ccw(c54.13,45.903) C45.2@54.873,45.16 ; 54.302,44.852 cw(c54.302,44.044) C45.2@54.873,44.616 ; v1@55.42,40.402 ccw(c55.693,40.675) 55.693,40.288 ; v1@55.522,40.288 60.032,40.288 C59.1@62.334,42.591 C60.2@62.334,44.915 ; 59.29,40.288 ccw(c59.29,41.848) v1@60.392,40.745 ; 61.46,41.717 ccw(c60.586,42.591) C59.1@61.822,42.591 ; C59.1@61.767,42.023 cw(c62.207,41.583) C59.1@62.207,42.206 ; C59.1@62.062,42.863 ccw(c61.405,43.52) 62.334,43.52 ccw(c63.264,43.52) C59.1@62.606,42.863 ; C60.2@62.105,44.686 cw(c61.553,44.134) 62.334,44.134 ; C60.2@62.105,45.23 ccw(c61.448,45.888) 62.378,45.888 ccw(c63.307,45.888) C60.2@62.65,45.23 ; 62.334,43.924 cw(c63.412,43.924) C60.2@62.65,44.686 ; C60.2@62.378,44.958 62.378,46.257 62.837,46.717 ; 62.883,46.671 69.058,46.671 73.646,51.259 RPi4.39@73.646,53.876 ; 69.915,47.528 ccw(c69.215,48.228) v1@70.205,48.228 ; v1@70.285,48.308 ccw(c70.285,49.297) 70.984,48.597 ; RPi4.39@73.266,53.496 cw(c72.348,52.578) 73.646,52.578 cw(c74.943,52.578) RPi4.39@74.026,53.496 ; LED2.2@88.085,31.157 LED2.2@88.416,31.489 ; LED3.2@88.124,25.825 ccw(c87.5,26.449) 88.382,26.449 ; LED2.2@88.144,31.217 cw(c87.57,30.643) 88.382,30.643 ; LED3.2@88.382,25.553 LED2.2@88.382,31.157 ; 88.382,26.516 ccw(c89.359,26.516) LED3.2@88.668,25.825 ; 88.382,30.477 cw(c89.429,30.477) LED2.2@88.689,31.217 ; C23.2@37.473,32.35 38.065,31.758
  Bottom Layer w0.19: v1@46.188,48.29 cw(c45.757,47.858) 46.367,47.858 ; v1@46.201,39.424 ccw(c45.8,39.825) 46.367,39.825 ccw(c46.934,39.825) v1@46.533,39.424 ; v1(46.367,39.257) v1@46.367,48.537 ; 46.367,47.919 cw(c46.892,47.919) v1@46.521,48.29 ; v1@60.449,40.454 cw(c60.449,39.886) 60.85,40.287 cw(c61.251,40.689) v1@60.684,40.689 ; v1(60.449,40.689) 66.254,34.883 67.114,34.883 70.255,31.742 70.255,8.963 P3.49@69.045,7.752 ; v1@61.858,48.476 61.858,48.219 67.822,42.255 79.254,42.255 81.024,40.485 81.024,18.929 86.825,13.128 86.825,11.817 ; v1@61.935,48.45 ccw(c62.678,48.45) 62.152,47.924 ; v1@62.125,48.45 ccw(c63.327,48.45) 62.477,47.6 ; 65.852,44.225 ccw(c66.985,45.359) v1@66.985,43.756 ; 66.176,43.901 ccw(c66.985,44.71) v1@66.985,43.566 ; 66.5,43.576 ccw(c66.985,44.061) v1@66.985,43.376 ; 66.65,43.521 ccw(c66.877,43.521) v1@66.717,43.36 ; v1@66.825,43.252 ccw(c66.985,43.413) 66.985,43.186 ; v1@66.84,43.521 ccw(c67.526,43.521) 67.041,43.036 ; v1@67.03,43.521 ccw(c68.175,43.521) 67.365,42.711 ; v1@67.22,43.521 ccw(c68.823,43.521) 67.69,42.387 ; 68.932,5.636 69.045,5.748 ; P3.49@69.045,8.255 ccw(c69.045,9.468) 69.902,8.61 ccw(c70.76,7.752) P3.49@69.547,7.752 ; P3.49@69.045,8.445 ccw(c69.045,10.116) 70.227,8.934 ccw(c71.409,7.752) P3.49@69.737,7.752 ; P3.60@81.745,9.747 P3.60@81.745,10.292 ; P3.64@86.24,10.522 ccw(c84.829,11.933) 86.825,11.933 ; P3.64@86.369,10.814 ccw(c85.492,11.817) 86.825,11.817 ; P3.64@86.494,10.671 ccw(c85.858,11.399) 86.825,11.399 ccw(c87.792,11.399) P3.64@87.155,10.671 ; P3.64@86.825,10.292 86.825,11.817 ; P3.64@87.281,10.814 cw(c88.158,11.817) 86.825,11.817 ; P3.64@87.375,10.489 cw(c88.704,11.817) 86.825,11.817 ; 88.692,32.018 88.78,31.93
  Bottom Layer w0.25: v1@51.253,39.917 ccw(c50.841,40.329) 51.424,40.329 ; v1(51.398,39.772) 51.424,39.798 51.424,40.834 52.05,41.46 55.041,41.46 55.364,41.138 v1(55.364,40.345) ; 51.424,40.205 ccw(c51.831,40.205) v1@51.543,39.917 ; v1@55.219,40.49 ccw(c54.869,40.84) 55.364,40.84 ccw(c55.859,40.84) v1@55.509,40.49
  Bottom Layer w0.5: 33.785,18.77 34.226,19.21 36.837,19.21 36.889,19.159 ; 33.881,18.866 cw(c34.189,18.557) v1@34.189,18.993 ; v1@34.246,19.017 cw(c34.713,18.55) v1@34.713,19.21 ; v1@34.42,19.21 cw(c34.42,18.611) v1@34.843,19.035 ; v1@34.956,19.035 cw(c35.38,18.611) 35.38,19.21 ; P3.31@46.185,7.752 P3.33@48.725,7.752 48.725,6.358 49.448,5.636 68.932,5.636 74.693,5.636 75.525,4.804 87.176,4.804 89.583,7.211 89.583,31.127 88.78,31.93 ; P3.31@46.565,7.372 cw(c47.482,6.455) 47.482,7.752 cw(c47.482,9.05) P3.31@46.565,8.132 ; P3.33@48.345,8.132 cw(c47.427,9.05) 47.427,7.752 cw(c47.427,6.455) 48.345,7.372 cw(c47.427,6.455) 48.725,6.455 cw(c50.022,6.455) P3.33@49.105,7.372 ; v1(52.836,49.967) 52.843,49.96 v1@52.843,46.456 ; P3.41@58.505,7.372 cw(c57.587,6.455) 58.885,6.455 cw(c60.182,6.455) P3.41@59.265,7.372 ; 58.885,5.782 P3.41@58.885,7.752 ; P3.49@68.665,7.372 cw(c67.747,6.455) 69.045,6.455 cw(c70.342,6.455) P3.49@69.425,7.372 ; 69.045,5.748 P3.49@69.045,7.752 ; P3.51@71.205,7.372 cw(c70.287,6.455) 71.585,6.455 cw(c72.882,6.455) P3.51@71.965,7.372 ; P3.51@71.205,8.132 ccw(c70.287,9.05) 71.585,9.05 ccw(c72.882,9.05) P3.51@71.965,8.132 ; P3.52@71.205,9.912 cw(c70.287,8.995) 71.585,8.995 cw(c72.882,8.995) P3.52@71.965,9.912 ; 71.585,5.773 P3.51@71.585,7.752 P3.52@71.585,10.292 ; v1(72.09,23.901) 72.09,16.93 v1(74.209,14.812) ; P3.60@81.745,9.747 82.996,8.496 ; P3.60@81.782,10.292 ccw(c83.109,10.259) 82.171,9.321 ; P3.60@82.282,10.279 ccw(c84.72,10.22) 82.996,8.496 ; 82.996,4.851 82.996,8.496 ; 88.692,32.018 88.692,38.862 ; 89.583,15.86 cw(c91.241,15.86) v1@90.069,17.032 ; 89.583,17.067 cw(c90.034,17.067) 89.715,17.385 ; 89.583,17.11 ccw(c90.034,17.11) 89.715,16.791 ; 89.583,18.317 ccw(c91.241,18.317) v1@90.069,17.145
  other v1: 71.175,2.178 64.425,2.362 78.169,2.362 90.257,2.423 33.009,2.485 58.719,2.485 53.81,2.546 84.367,2.546 38.471,2.607 48.779,2.607 43.87,2.73 30.896,12.701 32.188,12.722 29.635,12.763 28.546,13.225 27.678,13.904 75.073,14.999 81.851,15.51 85.977,16.351 81.2,16.383 68.201,17.016 90.012,17.088 2.944,17.518 49.955,17.837 52.047,17.856 69.127,17.888 86.614,18.816 83.165,19.047 34.189,19.073 34.9,19.091 15.085,20.458 88.135,20.668 85.349,21.445 82.161,21.673 2.913,21.969 14.761,22.101 2.627,27.27 68.087,27.786 67.311,30.244 66.101,30.796 64.765,31.472 2.821,32.244 65.954,32.362 69.472,36.205 2.849,36.57 77.317,36.778 78.402,36.849 58.91,37.273 70.376,37.664 76.818,37.882 69.329,37.998 59.965,38.064 78.011,38.113 58.396,38.289 71.868,38.791 70.345,39.109 59.502,39.215 76.266,39.235 77.388,39.306 60.85,39.414 43.64,40.956 2.575,41.325 66.985,43.521 68.38,43.52 77.28,44.615 86.29,44.915 71.123,45.13 74.105,45.216 69.664,45.988 52.857,46.294 2.691,46.631 13.798,47.466 88.897,47.647 82.93,47.71 13.17,47.786 79.248,48.028 72.027,48.075 70.285,48.228 46.354,48.456 63.979,48.501 76.053,48.565 67.8,48.749 44.849,48.991 86.119,49.163 45.712,49.378 55.958,49.578 65.287,49.698 60.086,49.856 63.469,49.851 28.53,50.897 32.58,50.897 26.773,50.933 30.617,50.958 35.464,51.081 38.256,51.142 54.896,51.134 59.425,51.142 63.912,51.426 66.273,51.439 70.274,51.509 75.664,51.606 56.869,51.843 81.914,52.344 18.345,52.492 89.214,52.492 86.754,52.672 16.025,52.888 2.659,53.741 16.656,54.551 19.081,55.683 87.183,55.836 15.292,56.392 83.12,56.978 90.073,57.278 3.434,58.137
IN1N: C1.2 P3.15 R1.6 US1.15 | length 141.6
  Top Layer w0.19: v1@43.742,27.817 44.791,27.817 45.421,28.446 US1.15@46.443,28.446 ; v1@43.881,27.66 cw(c44.259,27.282) 44.259,27.817 ; v1@43.881,27.993 ccw(c44.305,28.417) 44.305,27.817
  Top Layer w0.25: v1@16.514,29.589 cw(c16.176,29.251) 16.654,29.251 ; 16.654,29.227 cw(c17.165,29.227) v1@16.804,29.589 ; v1(16.659,29.734) 16.654,29.729 16.654,29.186 16.804,29.036 C1.2@16.804,27.958 ; v1@19.475,26.566 v1@19.683,26.566 ; v1@19.683,26.565 R1.6@21.569,26.565 ; v1@19.801,26.421 cw(c20.149,26.074) 20.149,26.565 ; v1@19.801,26.711 ccw(c20.154,27.064) 20.154,26.565 ; 20.879,26.565 cw(c20.879,26.218) R1.6@21.125,26.464 ; 20.93,26.565 ccw(c20.93,26.841) R1.6@21.125,26.646
  Bottom Layer w0.19: v1@16.493,29.568 cw(c16.092,29.167) 16.659,29.167 cw(c17.226,29.167) v1@16.825,29.568 ; v1(16.659,29.734) 16.659,27.459 17.552,26.566 v1(19.656,26.566) 21.26,26.566 24.19,29.497 27.29,29.497 28.957,27.829 44.861,27.829 45.197,27.493 45.197,26.927 44.717,26.446 30.424,26.446 26.315,22.337 23.862,22.337 20.525,19 6.602,19 1.272,13.67 1.272,5.187 5.407,1.052 22.676,1.052 25.865,4.241 P3.15@25.865,7.752 ; v1@19.49,26.4 ccw(c19.089,25.999) 19.089,26.566 ccw(c19.089,27.134) v1@19.49,26.732 ; v1@19.823,26.4 cw(c20.224,25.999) 20.224,26.566 cw(c20.224,27.134) v1@19.823,26.732 ; P3.15@25.375,7.263 cw(c24.193,6.081) 25.865,6.081 cw(c27.536,6.081) P3.15@26.354,7.263 ; P3.15@25.51,7.397 cw(c24.652,6.54) 25.865,6.54 cw(c27.078,6.54) P3.15@26.22,7.397 ; 43.142,27.829 cw(c43.142,27.253) v1@43.549,27.66 ; 43.154,27.829 ccw(c43.154,28.388) v1@43.549,27.993 ; v1@43.881,27.66 cw(c44.288,27.253) 44.288,27.829 ; v1@43.881,27.993 ccw(c44.276,28.388) 44.276,27.829
  other v1: 43.715,27.826
IN1P: C1.1 P3.16 R1.5 US1.16 | length 130.1
  Top Layer w0.19: v1@15.847,29.296 v1(15.854,29.289) ; v1@44.368,27.198 44.756,27.198 45.504,27.946 US1.16@46.443,27.946 ; v1@44.446,27.197 v1@44.484,27.236 ; v1@44.454,27.236 v1@44.484,27.236 ; v1@44.572,27.324 v1@44.484,27.236 ; 45.276,27.719 cw(c45.693,27.302) US1.16@45.693,27.891
  Top Layer w0.25: v1@15.854,29.084 cw(c15.854,28.589) 16.204,28.939 cw(c16.554,29.289) v1@16.059,29.289 ; v1(15.854,29.289) 16.304,28.839 C1.1@16.304,27.958 ; v1@20.346,25.765 R1.5@21.569,25.765 ; v1@20.403,25.63 cw(c20.729,25.305) 20.729,25.765 ; v1@20.403,25.92 ccw(c20.778,26.295) 20.778,25.765 ; 20.879,25.765 cw(c20.879,25.418) R1.5@21.125,25.664 ; 20.93,25.765 ccw(c20.93,26.041) R1.5@21.125,25.846
  Bottom Layer w0.19: v1@15.688,29.123 cw(c15.287,28.722) 15.854,28.722 cw(c16.421,28.722) v1@16.02,29.123 ; v1(15.854,29.289) 15.854,26.886 16.964,25.775 v1(20.258,25.775) 21.03,25.775 24.357,29.102 26.984,29.102 28.889,27.197 ; v1@20.092,25.609 ccw(c19.691,25.208) 19.691,25.775 ccw(c19.691,26.343) v1@20.092,25.942 ; v1@20.425,25.609 cw(c20.826,25.208) 20.826,25.775 cw(c20.826,26.343) v1@20.425,25.942 ; P3.16@25.865,9.6 cw(c25.865,9.136) 26.193,9.464 ; P3.16@25.865,10.292 25.865,9.792 27.043,8.614 ; P3.16@25.985,10.272 ccw(c26.974,10.102) 26.265,9.392 ; P3.16@26.173,10.24 ccw(c27.417,10.026) 26.524,9.133 ; P3.16@26.36,10.207 ccw(c27.86,9.949) 26.784,8.873 ; P3.16@26.547,10.175 ccw(c28.302,9.873) 27.043,8.614 ; 43.862,27.156 ccw(c43.862,27.735) v1@44.271,27.326 ; 43.878,27.156 cw(c43.878,26.6) v1@44.271,26.993 ; v1@44.446,27.197 44.404,27.156 28.889,27.156 28.889,25.971 25.671,22.753 23.725,22.753 20.399,19.427 6.326,19.427 0.863,13.964 0.863,4.989 5.19,0.662 23.864,0.662 27.043,3.841 27.043,8.614
  other v1: 44.438,27.159